# Altium PCB PCB1.PcbDoc (part 2 of 2)
Units mil, origin at the board's own origin, x right, y up, seen from the top; angles counter-clockwise.
Board outline 6000 x 4000 mil, 2 copper layers (Top Layer, Bottom Layer); 40 components, 154 nets, 422 pads, 267 vias.
Unrouted connection lines stored in the file: 27.
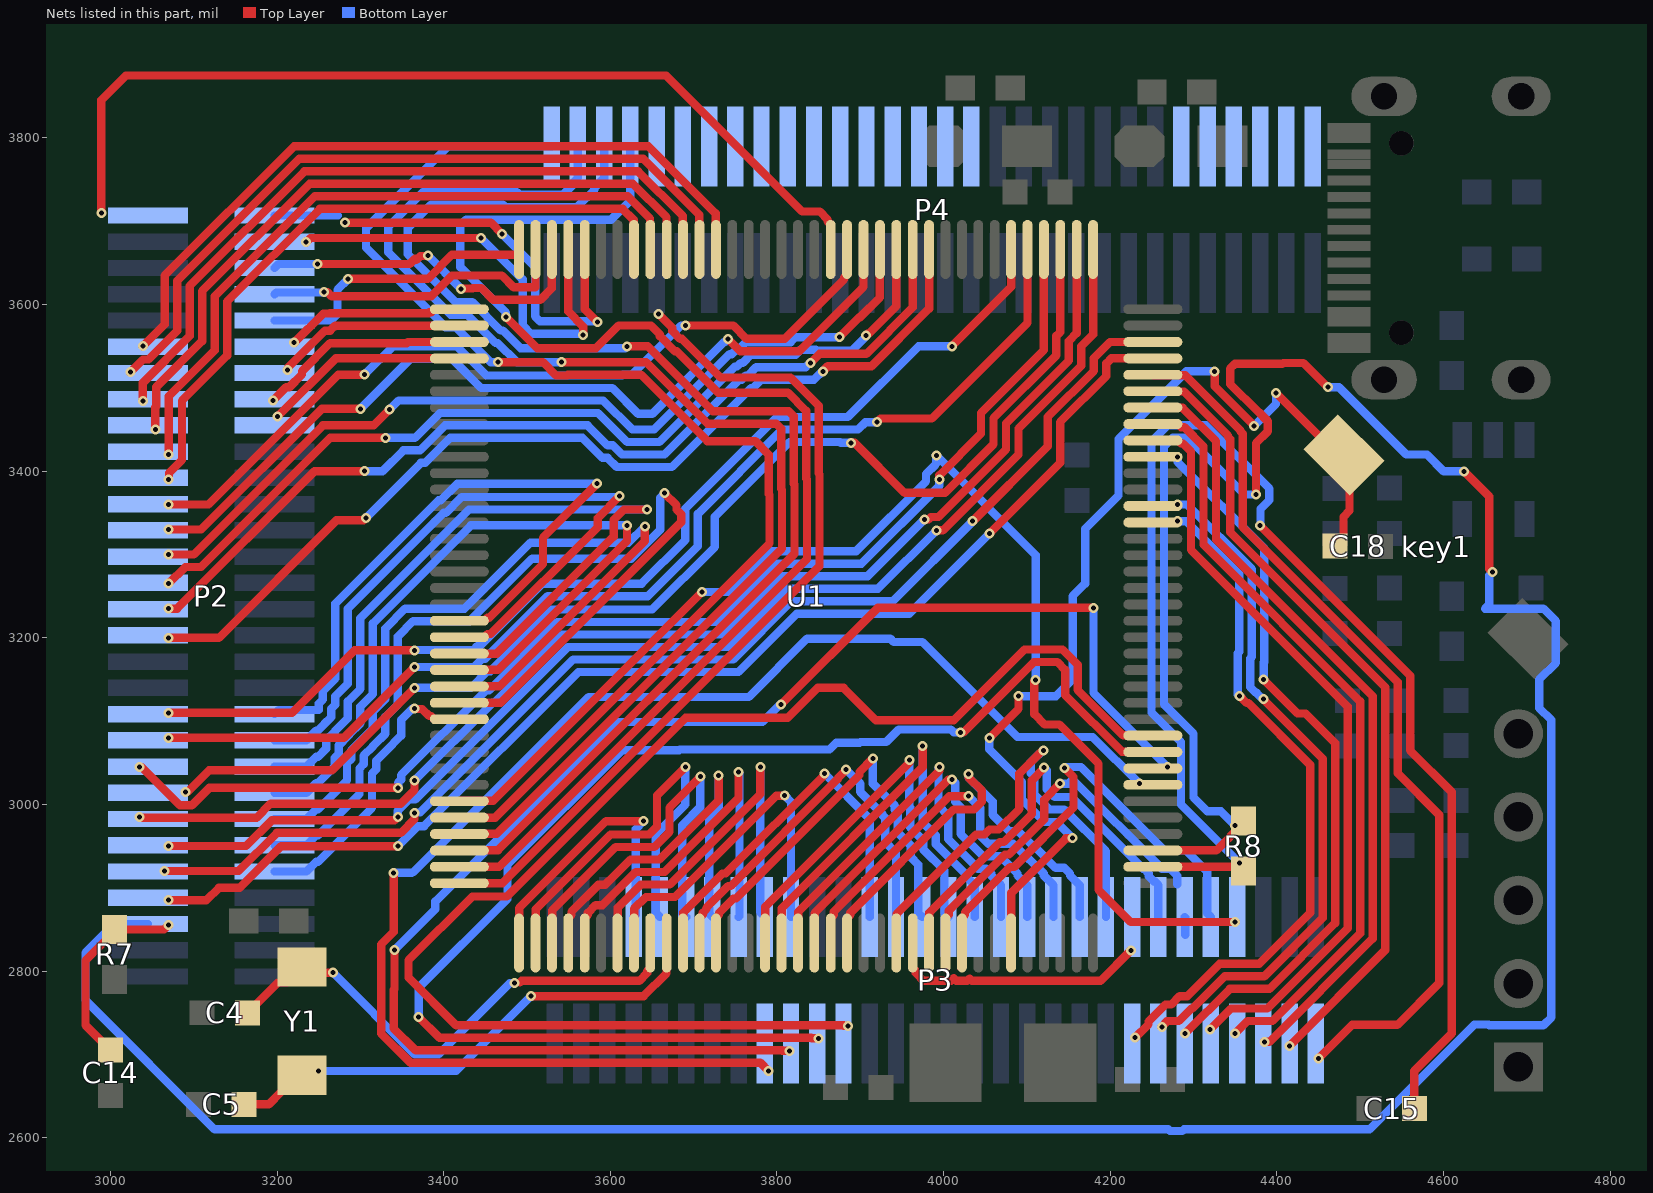
[diagram p2: the nets of this part, all layers, seen from the top]

## Via types
v1: diameter 12, hole 6, Top Layer to Bottom Layer, 267 vias

## Nets (pads, with @x,y where several pads share a name; then routed paths per layer and width w, separated by ;. In a path a pad name is that pad's centre, name@x,y a point inside that pad or via, vN(x,y) a via of type N, cw(c..) or ccw(c..) an arc to the next point about the centre after c; other vN are vias at no path point) (continued)
PC10: P3.53 U1.139 | length 1550.2
  Top Layer w10: U1.139@3418.74,3003.94 3419.09,3004.28 3459.43,3004.28 3710,3254.85 v1(3710,3255) ; v1(4110.5,3149.5) 4109,3148 4109,3108.37 4121.37,3096 4139,3096 4186,3049 4186,2897.54 4224.54,2859 v1(4350,2859)
  Bottom Layer w10: v1(3710,3255) 3743.84,3255 3792.84,3304 3895.21,3304 3979,3387.79 3979,3396.63 3990,3407.63 3990,3407.69 3990.93,3408.62 3990.93,3419.07 3990.66,3419.34 4110.5,3299.5 v1(4110.5,3149.5)
  other v1: 3991.31,3418.69
PC11: P4.60 U1.140 | length 1489.8
  Top Layer w10: U1.140@3418.74,2984.25 3461.88,2984.25 3791,3313.37 3791,3371.63 3790,3372.63 3790,3420 3773.95,3436.05 3716.52,3436.05 3636.57,3516 3549.25,3516 3548.25,3515 3535,3515 3519,3531 v1(3465.17,3531)
  Bottom Layer w10: v1(3465.17,3531) 3464.94,3530.77 3456.66,3530.77 3414.43,3573 3402,3573 3306.67,3668.33 3306.67,3691.67 3405,3790 P4.60@3529.53,3790
PC12: P4.58 U1.141 | length 1557.3
  Top Layer w10: U1.141@3418.74,2964.57 3419.09,2964.91 3463.75,2964.91 3806,3307.16 3806,3377.84 3805,3378.84 3805,3451.25 3799.14,3457.11 3716.68,3457.11 3642.79,3531 v1(3541.63,3531)
  Bottom Layer w10: v1(3541.63,3531) 3487.8,3531 3464.8,3554 3462.16,3554 3428.16,3588 3408.21,3588 3333.54,3662.67 3333.54,3693.54 3375,3735 3487.74,3735 3490.77,3731.97 3543.51,3731.97 3556.18,3744.64 3556.18,3746.97 3561.02,3751.81 P4.58@3561.02,3790
PC13: P3.19 U1.8 | length 427
  Top Layer w10: U1.8@3628.31,2833.74 3628.65,2834.09 3628.65,2874.87 3642.79,2889 3677.69,2889 3799.33,3010.63 v1(3809.37,3010.63)
  Bottom Layer w10: v1(3809.37,3010.63) 3816.93,3003.07 P3.19@3816.93,2865
PC14: C4.2 U1.9 Y1.2 | length 617.6
  Top Layer w10: C4.2@3164.5,2749.94 3200.9,2786.34 3211.38,2786.34 Y1.2@3230,2804.96 3236.82,2798.14 v1(3267,2798.14) ; 3491.38,2786.38 3493.31,2788.31 3634.9,2788.31 3644.21,2797.62 3644.21,2799.94 3647.99,2803.72 U1.9@3647.99,2833.74
  Bottom Layer w10: v1(3267,2798.14) 3365.14,2700 3393.69,2700 3479.3,2785.62 3484.62,2785.62 v1(3485,2786)
PC15: C5.2 U1.10 Y1.1 | length 587.6
  Top Layer w10: C5.2@3160,2640 3190,2640 3205.47,2655.47 3205.47,2656.42 3224.09,2675.04 Y1.1@3230,2675.04 ; v1(3505,2770) 3640,2770 3667.33,2797.33 3667.33,2833.39 U1.10@3667.68,2833.74
  Bottom Layer w10: v1(3250,2680) 3415,2680 v1(3505,2770)
PD0: P4.56 U1.142 | length 1595
  Top Layer w10: U1.142@3418.74,2944.88 3419.09,2945.23 3465.28,2945.23 3821,3300.95 3821,3384.05 3820,3385.05 3820,3466.25 3814.14,3472.11 3722.89,3472.11 3645,3550 v1(3620,3550)
  Bottom Layer w10: P4.56@3592.52,3790 3592.52,3751.81 3580.87,3740.16 3580.87,3737.83 3560.01,3716.97 3474.02,3716.97 3470.99,3720 3385,3720 3356.65,3691.65 3356.65,3660.78 3414.43,3603 3434.37,3603 3468.37,3569 3471.01,3569 3492.26,3547.75 3617.75,3547.75 v1(3620,3550)
PD1: P4.54 U1.143 | length 1593.3
  Top Layer w10: U1.143@3418.74,2925.2 3466.46,2925.2 3836,3294.73 3836,3390.27 3835,3391.27 3835,3472.47 3813.07,3494.39 3729.39,3494.39 3679.79,3544 3677.58,3544 3659.43,3562.16 3659.43,3564.36 3648.79,3575 3610,3575 3582.75,3547.75 3512.25,3547.75 v1(3475,3585)
  Bottom Layer w10: v1(3475,3585) 3474.62,3585.38 3474.62,3590.38 3420,3645 3420,3695 3426.97,3701.97 3601.11,3701.97 3624.02,3724.87 P4.54@3624.02,3790
PD2: P4.52 U1.144 | length 1022.9
  Top Layer w10: U1.144@3418.74,2905.51 3470.51,2905.51 3851,3286 3851,3396.48 3850,3397.48 3850,3478.68 3816.18,3512.5 3732.5,3512.5 3686,3559 3683.8,3559 3674.43,3568.37 3674.43,3571.99 v1(3657.77,3588.64)
PD3: P4.50
PD4: P4.48
PD5: P4.46
PD6: P4.44
PD7: P4.42
PD8: P2.49 U1.96 | length 897.9
  Top Layer w10: v1(3038.93,3550.07) 3065,3576.14 3065,3634.79 3220.21,3790 3645.88,3790 3726.39,3709.5 3726.39,3666.61 U1.96@3726.73,3666.26
PD9: P2.47 U1.97 | length 893.6
  Top Layer w10: v1(3023.93,3518.92) 3039.08,3534.07 3045.56,3534.07 3080,3568.51 3080,3628.57 3226.43,3775 3639.67,3775 3706.7,3707.97 3706.7,3666.61 U1.97@3707.05,3666.26
PD10: P2.45 U1.98 | length 872.7
  Top Layer w10: v1(3038.93,3484.46) 3038.93,3506.23 3095,3562.3 3095,3622.36 3232.64,3760 3633.45,3760 3687.02,3706.44 3687.02,3666.61 U1.98@3687.36,3666.26
PD11: P2.43 U1.99 | length 855.4
  Top Layer w10: v1(3053.93,3450.07) 3053.93,3476.84 3054.93,3477.84 3054.93,3501.02 3110,3556.08 3110,3616.15 3238.85,3745 3627.24,3745 3667.33,3704.91 3667.33,3666.61 U1.99@3667.68,3666.26
PD12: P2.41 U1.100 | length 833.3
  Top Layer w10: v1(3069.93,3420.07) 3069.93,3489.93 3125,3545 3125,3609.93 3245.07,3730 3621.03,3730 3647.65,3703.38 3647.65,3666.61 U1.100@3647.99,3666.26
PD13: P2.39 U1.101 | length 817.9
  Top Layer w10: v1(3069.93,3390.07) 3070.31,3390.45 3070.31,3397.82 3085.93,3413.44 3085.93,3484.72 3140,3538.79 3140,3603.72 3251.28,3715 3614.81,3715 3627.96,3701.85 3627.96,3666.61 U1.101@3628.31,3666.26
PD14: P2.60 U1.104 | length 557.4
  Top Layer w10: v1(3281.54,3698.46) 3456.54,3698.46 v1(3470,3685) ; U1.104@3569.25,3666.26 3569.25,3594.59 v1(3584.84,3579)
  Bottom Layer w10: P2.60@3196.97,3706.93 3273.07,3706.93 ; v1(3470,3685) 3509.68,3645.32 3509.68,3585.86 3515.54,3580 3583.84,3580 v1(3584.84,3579)
PD15: P2.58 U1.105 | length 525
  Top Layer w10: v1(3235,3675) 3240,3680 v1(3445,3680) ; U1.105@3549.57,3666.26 3549.57,3591.65 3567.46,3573.75 v1(3567.46,3563.75)
  Bottom Layer w10: v1(3445,3680) 3494.68,3630.32 3494.68,3579.64 3495,3579.33 3495,3574.64 3504.64,3565 3566.21,3565 v1(3567.46,3563.75)
PE0: P4.12
PE1: P4.10
PE2: P3.7 U1.1 | length 354.5
  Top Layer w10: U1.1@3490.53,2833.76 3490.53,2875.53 3595,2980 v1(3640,2980)
  Bottom Layer w10: P3.7@3627.95,2865 3630.62,2867.66 3630.62,2970.62 v1(3640,2980)
PE3: P3.9 U1.2 | length 510
  Top Layer w10: U1.2@3510.2,2833.74 3510.54,2834.09 3510.54,2874.33 3600.21,2964 3646.63,2964 3656,2973.37 3656,3011 3689.98,3044.98 v1(3690.3,3044.98)
  Bottom Layer w10: P3.9@3659.45,2865 3654.61,2869.84 3654.61,2964.61 3690,3000 3690,3044.68 v1(3690.3,3044.98)
PE4: P3.11 U1.3 | length 479.9
  Top Layer w10: U1.3@3529.88,2833.74 3530.23,2834.09 3530.23,2872.8 3606.43,2949 3652.84,2949 3671,2967.16 3671,2996.1 v1(3708.25,3033.35)
  Bottom Layer w10: P3.11@3690.95,2865 3686.43,2869.52 3686.43,2975.21 3707.92,2996.71 3707.92,3033.02 v1(3708.25,3033.35)
PE5: P3.13 U1.4 | length 477.4
  Top Layer w10: U1.4@3549.57,2833.74 3549.57,2863.76 3553.35,2867.54 3553.35,2871.38 3585.62,2903.66 3593.8,2903.66 3605.15,2915 3624.15,2934 3659.05,2934 3730,3004.95 v1(3730,3035)
  Bottom Layer w10: P3.13@3722.44,2865 3718.83,2868.61 3718.83,2985.87 3730,2997.03 v1(3730,3035)
PE6: P3.15 U1.5 | length 481.8
  Top Layer w10: U1.5@3569.25,2833.74 3569.25,2863.76 3573.03,2867.54 3573.03,2869.86 3582.35,2879.17 3590.53,2879.17 3630.36,2919 3665.27,2919 3753.94,3007.67 v1(3753.94,3038.94)
  Bottom Layer w10: P3.15@3753.94,2865 3755,2866.06 3755,3037.33 3753.94,3038.4 v1(3753.94,3038.94)
PE7: P3.60 U1.68 | length 1077.5
  Top Layer w10: U1.68@4251.26,3515.75 4251.61,3515.4 4290.06,3515.4 4356.43,3449.03 4356.43,3447.48 4359,3444.9 4359,3333.02 4545,3147.02 4545,3037.63 4595,2987.63 4595,2785.73 4544.75,2735.47 4490.47,2735.47 v1(4450,2695)
PE8: P2.7 U1.69 | length 1463.3
  Top Layer w10: v1(3069.93,2885.07) 3115.07,2885.07 3130,2900 3155,2900 3205,2950 v1(3345,2950) ; v1(4055,3325) 4140,3410 4140,3458.93 4195.43,3514.37 4195.43,3529.58 4201.29,3535.43 U1.69@4226.22,3535.43
  Bottom Layer w10: v1(3345,2950) 3369,2974 3376.57,2974 3561.57,3159 3753.91,3159 3823.91,3229 3959,3229 v1(4055,3325)
PE9: P2.9 U1.70 | length 1483.4
  Top Layer w10: v1(3064.93,2920.07) 3153.86,2920.07 3199.79,2966 3348.63,2966 3365,2982.37 v1(3365,2990) ; v1(4035.03,3339.97) 4125,3429.95 4125,3465.15 4180.43,3520.58 4180.43,3535.79 4199.76,3555.12 U1.70@4251.26,3555.12
  Bottom Layer w10: v1(3365,2990) 3365.38,2990.38 3371.74,2990.38 3555.36,3174 3747.69,3174 3817.69,3244 3939.05,3244 v1(4035.03,3339.97)
PE10: P2.11 U1.73 | length 1502.5
  Top Layer w10: v1(3069.93,2950.07) 3162.64,2950.07 3193.57,2981 3341,2981 v1(3345,2985) ; v1(3991.37,3329) 3999.05,3329 4090,3419.95 4090,3451.36 4165.43,3526.79 4165.43,3550.08 4179.49,3564.14 U1.73@4179.49,3666.26
  Bottom Layer w10: v1(3345,2985) 3345,2992.63 3358.37,3006 3366,3006 3549,3189 3741.48,3189 3811.48,3259 3921.37,3259 v1(3991.37,3329)
PE11: P2.13 U1.74 | length 1505.4
  Top Layer w10: v1(3035,2985) 3036,2984 3175.36,2984 3192.36,3001 3348.63,3001 3365,3017.37 v1(3365,3028.61) ; v1(3976.82,3341.77) 3977.21,3342.15 3981.9,3342.15 3984.75,3345 3993.84,3345 4075,3426.16 4075,3457.57 4150.43,3533.01 4150.43,3556.29 4159.8,3565.66 U1.74@4159.8,3666.26
  Bottom Layer w10: v1(3365,3028.61) 3458.39,3122 3460.49,3122 3542.49,3204 3735.27,3204 3805.27,3274 3909,3274 v1(3976.82,3341.77) v1(3976.82,3341.77)
PE12: P2.15 U1.75 | length 1481.7
  Top Layer w10: v1(3090,3015) 3092.37,3015 3118.33,3040.96 3265.96,3040.96 v1(3365,3140) ; v1(3888.75,3434) 3893.37,3434 3953.37,3374 4001.63,3374 4060,3432.37 4060,3463.79 4135.43,3539.22 4135.43,3562.51 4140.12,3567.19 U1.75@4140.12,3666.26
  Bottom Layer w10: v1(3365,3140) 3432.55,3140 3452.55,3160 3456.07,3160 3530.07,3234 3650.21,3234 3725.52,3309.31 3725.52,3345.52 3815,3435 3876.08,3435 3876.7,3434.38 3888.36,3434.38 v1(3888.75,3434)
PE13: P2.17 U1.76 | length 1480.2
  Top Layer w10: v1(3035,3045) 3037.37,3045 3083.37,2999 3097.59,2999 3118.59,3020 v1(3345,3020) ; v1(3995,3390) 3995,3395.14 4045,3445.14 4045,3470 4120.43,3545.43 U1.76@4120.43,3666.26
  Bottom Layer w10: v1(3345,3020) 3345.38,3020.38 3345.38,3026.13 3349,3029.74 3349,3035.24 3450.76,3137 3454.28,3137 3536.28,3219 3729.05,3219 3799.05,3289 3901.43,3289 3995,3382.57 v1(3995,3390)
PE14: P2.19 U1.77 | length 1348
  Top Layer w10: v1(3069.93,3080.07) 3280.07,3080.07 v1(3365,3165) ; v1(3920,3459) 3924.34,3463.34 3985.97,3463.34 4100.75,3578.12 U1.77@4100.75,3666.26
  Bottom Layer w10: v1(3365,3165) 3436.34,3165 3446.34,3175 3449.85,3175 3524.85,3250 3645,3250 3705,3310 3705,3348.79 3806.21,3450 3897.37,3450 3905.99,3458.62 3919.62,3458.62 v1(3920,3459)
PE15: P2.21 U1.78 | length 1290
  Top Layer w10: v1(3069.93,3110.07) 3217.91,3110.07 3292.84,3185 v1(3365,3185) ; v1(4010,3550) 4010,3550.25 4081.06,3621.31 U1.78@4081.06,3666.26
  Bottom Layer w10: v1(3365,3185) 3365.38,3185.38 3435.51,3185.38 3440.12,3190 3443.64,3190 3518.64,3265 3637.57,3265 3690,3317.43 3690,3355 3800,3465 3885,3465 3970,3550 v1(4010,3550)
PF0: P3.31 U1.16 | length 498.8
  Top Layer w10: U1.16@3785.79,2833.74 3786.13,2834.09 3786.13,2877.35 3959,3050.21 v1(3959,3053.19)
  Bottom Layer w10: v1(3959,3053.19) 3959,2997.31 3960,2996.31 3960,2972.3 3975.6,2956.7 3975.6,2946.11 4001.06,2920.65 4001.06,2869.84 P3.31@4005.91,2865
PF1: P3.33 U1.17 | length 537.3
  Top Layer w10: U1.17@3805.47,2833.74 3805.82,2834.09 3805.82,2875.56 3975,3044.75 v1(3975,3070)
  Bottom Layer w10: v1(3975,3070) 3975,2978.51 3990.6,2962.91 3990.6,2952.32 4025.75,2917.17 4025.75,2914.84 4037.4,2903.19 P3.33@4037.4,2865
PF2: P3.35 U1.18 | length 499.1
  Top Layer w10: U1.18@3825.16,2833.74 3825.5,2834.09 3825.5,2871.01 3995,3040.5 v1(3995,3045)
  Bottom Layer w10: v1(3995,3045) 3994,3044 3994,2998.57 4005.6,2986.98 4005.6,2958.54 4041.1,2923.03 4051.39,2923.03 4057.24,2917.17 4057.24,2914.84 4068.9,2903.19 P3.35@4068.9,2865
PF3: P3.37 U1.19 | length 481.7
  Top Layer w10: U1.19@3844.84,2833.74 3845.19,2834.09 3845.19,2869.48 4005.71,3030 v1(4010,3030)
  Bottom Layer w10: v1(4010,3030) 4014,3026 4014,3003.37 4020.6,2996.77 4020.6,2964.75 4047.32,2938.03 4067.88,2938.03 4088.74,2917.17 4088.74,2914.84 4100.39,2903.19 P3.37@4100.39,2865
PF4: P3.39 U1.20 | length 463.6
  Top Layer w10: U1.20@3864.53,2833.74 3864.53,2863.76 3868.31,2867.54 3868.31,2871.38 4006.92,3010 v1(4030,3010)
  Bottom Layer w10: v1(4030,3010) 4044,2996 4044,2962.56 4053.53,2953.03 4059.54,2953.03 4083.28,2953.03 4102.31,2934 4103.41,2934 4120.24,2917.17 4120.24,2914.84 4131.89,2903.19 P3.39@4131.89,2865
PF5: P3.41 U1.21 | length 530.1
  Top Layer w10: U1.21@3884.21,2833.74 3884.21,2863.76 3887.99,2867.54 3887.99,2869.86 4012.14,2994 4036.63,2994 4046,3003.37 4046,3016.63 4030,3032.63 v1(4030,3036.31)
  Bottom Layer w10: v1(4030,3036.31) 4030,3032.63 4059,3003.63 4059,2987.68 4078.64,2968.03 4089.49,2968.03 4108.52,2949 4109.62,2949 4134.62,2924 4144.91,2924 4151.73,2917.17 4151.73,2914.84 4163.39,2903.19 P3.41@4163.39,2865
PF6: P3.43 U1.24 | length 572.2
  Top Layer w10: U1.24@3943.27,2833.74 3943.61,2834.09 3943.61,2868.61 4039,2964 4049.05,2964 4055.05,2970 4066.21,2970 4091,2994.79 4091,3037.14 4118.86,3065 v1(4120,3065)
  Bottom Layer w10: v1(4120,3065) 4119.46,3065 4114.72,3060.26 4114.15,3060.26 4104.77,3050.89 4104.77,3037.65 4109,3033.43 4109,3012.16 4127.16,2994 4144.87,2994 4194.88,2943.99 P3.43@4194.88,2865
PF7: P3.45 U1.25 | length 320
  Top Layer w10: U1.25@3962.95,2833.74 3962.95,2803.72 3966.73,2799.94 3966.73,2797.62 3976.05,2788.31 4008.91,2788.31 4012.17,2791.56 4015.42,2788.31 4028.6,2788.31 4031.33,2791.04 4034.07,2788.31 4087.65,2788.31 4094.16,2788.31 4188.31,2788.31 v1(4225,2825)
PF8: P3.47 U1.26 | length 519.5
  Top Layer w10: U1.26@3982.64,2833.74 3982.98,2834.09 3982.98,2870.41 4067.57,2955 4072.43,2955 4106,2988.57 4106,3028.97 4120.77,3043.74 v1(4120.77,3044.26)
  Bottom Layer w10: v1(4120.77,3044.26) 4124,3041.03 4124,3018.37 4133.37,3009 4153.37,3009 4239.34,2923.03 4240.36,2923.03 4246.22,2917.17 4246.22,2913.89 4252.08,2908.03 4253.03,2908.03 4257.87,2903.19 P3.47@4257.87,2865
PF9: P3.49 U1.27 | length 473.4
  Top Layer w10: U1.27@4002.32,2833.74 4002.32,2863.76 4006.1,2867.54 4006.1,2872.32 4073.79,2940 4078.64,2940 4121,2982.36 4121,3006 v1(4140,3025)
  Bottom Layer w10: v1(4140,3025) 4150,3025 4155,3030 4261.97,2923.03 4271.86,2923.03 4280.66,2914.23 P3.49@4280.66,2904.34 ; P3.49@4289.37,2865 4290,2864.37 P3.49@4290,2843.61
PF10: P3.51 U1.28 | length 583.3
  Top Layer w10: U1.28@4022.01,2803.72 U1.28@4022.01,2833.74 4022.01,2863.76 4025.79,2867.54 4025.79,2870.79 4080,2925 4084.85,2925 4156,2996.15 4156,3033 v1(4145,3044)
  Bottom Layer w10: v1(4145,3044) 4146,3045 4165,3045 4265,2945 4290.86,2945 4316.32,2919.54 4316.32,2869.55 P3.51@4320.87,2865
PF11: P3.46 U1.59 | length 819.3
  Top Layer w10: v1(4230,2720) 4246.05,2736.05 4246.05,2739.58 4266.46,2760 4273.45,2760 4283.45,2770 4292.57,2770 4331.26,2808.69 4378.74,2808.69 4440,2869.95 4440,3047.68 4365.95,3121.73 4363.81,3121.73 4355.54,3130 v1(4355,3130)
  Bottom Layer w10: v1(4281,3340) 4291.27,3340 4355,3276.27 4355,3183.37 4353,3181.37 4353,3132 v1(4355,3130)
PF12: P3.48 U1.60 | length 825.3
  Top Layer w10: v1(4262.05,2732.95) 4262.05,2733.5 4267.9,2739.35 4267.9,2740 4282.37,2740 4297.37,2755 4298.79,2755 4337.47,2793.69 4384.95,2793.69 4455,2863.73 4455,3055 4385,3125 4385,3125.31 v1(4384,3126.31)
  Bottom Layer w10: v1(4281,3360) 4292.48,3360 4370,3282.48 4370,3177.16 4368,3175.16 4368,3141 4375.07,3133.93 4375.84,3133.93 4383.46,3126.31 v1(4384,3126.31)
PF13: P3.50 U1.63 | length 879.3
  Top Layer w10: v1(4290,2725) 4343.69,2778.69 4391.17,2778.69 4470,2857.52 4470,3073.79 4434.58,3109.2 4424.8,3109.2 v1(4384,3150)
  Bottom Layer w10: v1(4280.69,3416.98) 4281,3416.67 4281,3411.02 4385,3307.02 4385,3170.95 4384.38,3170.33 4384.38,3150.38 v1(4384,3150)
PF14: P3.52 U1.64 | length 916.7
  Top Layer w10: U1.64@4251.26,3437.01 4281.28,3437.01 4285.06,3433.23 4287.38,3433.23 4297,3423.6 4297,3305.57 4485,3117.57 4485,2851.31 4388.69,2755 4345,2755 v1(4320,2730)
PF15: P3.54 U1.65 | length 934.2
  Top Layer w10: U1.65@4251.26,3456.69 4281.28,3456.69 4285.06,3452.91 4288.9,3452.91 4312,3429.82 4312,3311.79 4500,3123.79 4500,2845.09 4394.91,2740 4365,2740 v1(4350,2725)
PG0: P3.56 U1.66 | length 948.8
  Top Layer w10: U1.66@4251.26,3476.38 4251.61,3476.03 4287,3476.03 4327,3436.03 4327,3318 4515,3130 4515,2838.88 4391.12,2715 v1(4385,2715)
PG1: P3.58 U1.67 | length 970.8
  Top Layer w10: U1.67@4251.26,3496.06 4251.61,3495.72 4288.53,3495.72 4341.43,3442.82 4341.43,3441.27 4344,3438.69 4344,3326.8 4530,3140.8 4530,2825 v1(4415,2710)
PG2: P2.56 U1.106 | length 415.3
  Top Layer w10: v1(3248.78,3648.78) 3359.24,3648.78 3365.59,3655.13 3367.15,3653.57 3371.91,3658.33 3380.96,3658.33 v1(3381.34,3658.71) ; v1(3421.05,3619) 3421.44,3619.38 3434.63,3619.38 3435.25,3620 3445.25,3620 3459.42,3605.83 3515.93,3605.83 3529.54,3619.44 3529.54,3665.91 U1.106@3529.88,3666.26
  Bottom Layer w10: P2.56@3196.97,3643.94 3201.81,3648.78 v1(3248.78,3648.78) ; v1(3381.34,3658.71) v1(3421.05,3619)
PG3: P2.54 U1.107 | length 377.8
  Top Layer w10: v1(3256.5,3615.02) 3260.52,3615.02 3265.54,3610 3385,3610 3410,3635 3469.75,3635 3483.92,3620.83 3509.71,3620.83 3510.2,3621.31 U1.107@3510.2,3666.26
  Bottom Layer w10: P2.54@3196.97,3612.44 3199.17,3614.64 3256.12,3614.64 v1(3256.5,3615.02)
PG4: P2.52 U1.108 | length 349.4
  Top Layer w10: v1(3285,3631) 3381,3631 3410,3660 3489.68,3660 3490.51,3660.84 U1.108@3490.51,3666.26
  Bottom Layer w10: P2.52@3196.97,3580.95 3264.47,3580.95 3272.5,3588.97 3272.5,3617.96 3285,3630.46 v1(3285,3631)
PG5: P2.50 U1.109 | length 214.8
  Top Layer w10: v1(3220.58,3554.42) 3255.43,3589.27 3263.06,3589.27 3263.59,3589.8 3381.72,3589.8 3382.62,3590.71 3384.94,3590.71 3388.72,3594.49 U1.109@3418.74,3594.49
PG6: P2.48 U1.110 | length 229.7
  Top Layer w10: v1(3212.58,3521.42) 3212.58,3523.79 3257.57,3568.79 3263.79,3568.79 3269.8,3574.8 U1.110@3418.74,3574.8
PG7: P2.46 U1.111 | length 255
  Top Layer w10: v1(3195,3485) 3210.8,3500.8 3214.58,3500.8 3230,3516.21 3230,3520 3263.79,3553.79 3355.66,3553.79 3356.99,3555.12 U1.111@3418.74,3555.12
PG8: P2.44 U1.112 | length 247.1
  Top Layer w10: v1(3200.56,3465.61) v1(3200.56,3465.61) 3270.43,3535.43 U1.112@3418.74,3535.43
PG9: P4.40
PG10: P4.38
PG11: P4.36
PG12: P4.34
PG13: P4.32
PG14: P4.30
PG15: P4.28
PH2: P3.18 U1.43 | length 1766.2
  Top Layer w10: v1(3340,2918) 3340,2846.91 3325,2831.91 3325,2725.15 3360.15,2690 3370.15,2690 3780,2690 v1(3790,2680)
  Bottom Layer w10: v1(3340,2918) 3361.79,2918 3362.79,2919 3364,2919 3574,3129 3766.33,3129 3836.33,3199 3936.05,3199 3940.11,3194.95 3974.53,3194.95 4088.47,3081 4179,3081 v1(4235,3025)
PH3: P3.20 U1.44 | length 1823.1
  Top Layer w10: v1(3341,2825.29) 3341,2778.55 3340,2777.55 3340,2731.36 3366.36,2705 3376.36,2705 3806,2705 3806.62,2704.38 3814.62,2704.38 v1(3815,2704) ; v1(3805,3120) 3921,3236 v1(4180,3236)
  Bottom Layer w10: v1(3341,2825.29) 3390,2874.29 3390,2883.64 3605.36,3099 3782.59,3099 3803.59,3120 v1(3805,3120) ; v1(4180,3236) 4180,3134 v1(4269,3045)
PH4: P3.22 U1.45 | length 1658.6
  Top Layer w10: v1(3370,2745) 3395,2720 3841,2720 3841.62,2719.38 3849.62,2719.38 v1(3850,2719) ; v1(4020.07,3086.31) 4023.68,3086.31 4108.37,3171 4136.63,3171 4146,3161.63 4146,3131.43 4214.09,3063.34 4250.91,3063.34 U1.45@4251.26,3062.99
  Bottom Layer w10: v1(3370,2745) 3370,2780 3476.61,2886.61 3476.61,2927.83 3613.79,3065 3682.37,3065 3683.37,3066 3863.16,3066 3871.16,3074 3899.05,3074 3900.05,3075 3931.21,3075 3946.21,3090 4008.79,3090 4012.4,3086.38 4019.99,3086.38 v1(4020.07,3086.31)
PH5: P3.24 U1.46 | length 1712.9
  Top Layer w10: v1(3885,2734) 3884.62,2734.38 3880.41,2734.38 3879.8,2735 3415,2735 3357.83,2792.17 3357.83,2813.08 3434.35,2889.61 3475.82,2889.61 3690.21,3104 3812.79,3104 3848.79,3140 3880,3140 3919,3101 4012.14,3101 4097.14,3186 4142.84,3186 4161,3167.84 4161,3137.64 4215.62,3083.02 4250.91,3083.02 U1.46@4251.26,3082.68
PH6: P2.27 U1.83 | length 1176.5
  Top Layer w10: v1(3069.93,3200.07) 3130.07,3200.07 3271,3341 3303.63,3341 v1(3306.58,3343.96) ; v1(3855,3520) 3861,3526 3913.57,3526 3982.64,3595.06 U1.83@3982.64,3666.26
  Bottom Layer w10: v1(3306.58,3343.96) 3372.63,3410 3377.72,3410 3407.72,3440 3566.51,3440 3590.51,3416 3596.72,3416 3607.72,3405 3673.79,3405 3768.79,3500 3771.36,3500 3781.36,3510 3844.46,3510 3854.46,3520 v1(3855,3520)
PH7: P2.29 U1.84 | length 1141.4
  Top Layer w10: v1(3069.93,3235.07) 3080.07,3235.07 3245,3400 v1(3305,3400) ; v1(3840,3530) 3851,3541 3907.36,3541 3962.95,3596.59 U1.84@3962.95,3666.26
  Bottom Layer w10: v1(3305,3400) 3326.63,3400 3351.63,3425 3371.51,3425 3401.51,3455 3572.72,3455 3596.72,3431 3602.93,3431 3613.93,3420 3665,3420 3755,3510 3757.57,3510 3762.57,3515 3765.15,3515 3775.15,3525 3834.46,3525 3839.46,3530 v1(3840,3530)
PH8: P2.31 U1.85 | length 1109.9
  Top Layer w10: v1(3069.93,3265.07) 3089.93,3285.07 3108.86,3285.07 3263.79,3440 v1(3330,3440) ; v1(3906.87,3563.13) 3908.73,3565 3910,3565 3943.27,3598.27 U1.85@3943.27,3666.26
  Bottom Layer w10: v1(3330,3440) 3365.29,3440 3395.29,3470 3585.15,3470 3620.15,3435 3658.79,3435 3749.4,3525.62 3751.98,3525.62 3756.36,3530 3758.93,3530 3768.93,3540 3822.59,3540 3828.59,3546 3846.63,3546 3847.63,3545 3890,3545 3906.87,3561.87 v1(3906.87,3563.13)
PH9: P2.33 U1.86 | length 1068.1
  Top Layer w10: v1(3069.93,3300.07) 3100.07,3300.07 3255,3455 3316,3455 v1(3335,3474) ; v1(3875,3561) 3898.98,3584.98 3899.98,3584.98 3923.58,3608.58 U1.86@3923.58,3666.26
  Bottom Layer w10: v1(3335,3474) 3346,3485 3591.36,3485 3626.36,3450 3652.57,3450 3743.19,3540.62 3745.76,3540.62 3750.15,3545 3752.72,3545 3762.72,3555 3816.37,3555 3822.37,3561 v1(3875,3561)
PH10: P2.35 U1.87 | length 1066.2
  Top Layer w10: v1(3069.93,3330.07) 3108.86,3330.07 3253.79,3475 v1(3300,3475) ; v1(3741.52,3558.48) 3756,3544 3826.59,3544 3903.9,3621.31 U1.87@3903.9,3666.26
  Bottom Layer w10: v1(3300,3475) 3360,3535 3410,3535 3445,3500 3602.37,3500 3633.37,3469 3650.36,3469 3736.98,3555.62 3738.12,3555.62 3740.98,3558.48 v1(3741.52,3558.48)
PH11: P2.37 U1.88 | length 1002.3
  Top Layer w10: v1(3069.93,3360.07) 3117.64,3360.07 3273.57,3516 v1(3305,3516) ; v1(3690.43,3575) 3747.63,3575 3763.63,3559 3809.29,3559 3880.43,3630.14 3880.43,3632.46 3884.21,3636.24 U1.88@3884.21,3666.26
  Bottom Layer w10: v1(3305,3516) 3339,3550 3416.21,3550 3451.21,3515 3614.15,3515 3615,3515.85 3625.85,3515.85 3685,3575 v1(3690.43,3575)
PH12: P2.59 U1.89 | length 1128.7
  Top Layer w10: v1(2989,3710) 2989,3845.57 3018.43,3875 3666.95,3875 3830.25,3711.69 3851.43,3711.69 3860.75,3702.38 3860.75,3700.06 3864.53,3696.28 U1.89@3864.53,3666.26
PH13: P2.22 U1.128 | length 816.6
  Top Layer w10: U1.128@3418.74,3220.47 3448.76,3220.47 3452.54,3224.25 3454.86,3224.25 3519.18,3288.57 3519.18,3320.3 v1(3583.88,3385)
  Bottom Layer w10: P2.22@3196.97,3108.5 3201.81,3113.35 3250.19,3113.35 3250.19,3121.2 3255,3126.02 3255,3136.3 3270,3151.3 3270,3241.21 3393.79,3365 3396.36,3365 3416.36,3385 v1(3583.88,3385)
PH14: P2.20 U1.129 | length 869
  Top Layer w10: U1.129@3418.74,3200.79 3448.76,3200.79 3452.54,3204.57 3456.38,3204.57 3585,3333.18 3585,3343.84 v1(3611.16,3370)
  Bottom Layer w10: P2.20@3196.97,3077.01 3235.16,3077.01 3246.81,3088.66 3249.14,3088.66 3256.55,3096.07 3256.55,3096.29 3265.19,3104.93 3265.19,3114.99 3270,3119.8 3270,3130.09 3285,3145.09 3285,3235 3400,3350 3402.57,3350 3421.57,3369 3610.16,3369 v1(3611.16,3370)
PH15: P2.18 U1.130 | length 951.3
  Top Layer w10: U1.130@3418.74,3181.1 3463.69,3181.1 3604,3321.41 3604,3341.63 3616.37,3354 v1(3644,3354)
  Bottom Layer w10: P2.18@3196.97,3045.51 3235.16,3045.51 3246.81,3057.17 3249.14,3057.17 3259,3067.02 3259,3077.31 3270,3088.31 3270,3088.49 3271.55,3090.04 ; 3271.55,3090.08 3285,3103.53 3285,3123.87 3300,3138.87 3300,3223.64 3430.36,3354 v1(3644,3354)
PI0: P2.16 U1.131 | length 913.9
  Top Layer w10: U1.131@3418.74,3161.42 3419.09,3161.76 3465.56,3161.76 3620,3316.2 v1(3620,3335)
  Bottom Layer w10: P2.16@3196.97,3014.02 3235.16,3014.02 3246.81,3025.67 3249.14,3025.67 3269,3045.53 3269,3055.81 3274,3060.81 3274,3071.09 3285,3082.09 3285,3082.28 3286.55,3083.83 3300,3097.32 3300,3117.66 3315,3132.66 3315,3217.43 3432.57,3335 v1(3620,3335)
PI1: P2.14 U1.132 | length 982.2
  Top Layer w10: U1.132@3418.75,3141.75 3466.76,3141.75 3641.37,3316.36 v1(3641.37,3333.85)
  Bottom Layer w10: P2.14@3196.97,2982.52 3235.16,2982.52 3246.81,2994.17 3249.14,2994.17 3284,3029.03 3284,3049.6 3289,3054.6 3289,3064.88 3300,3075.88 3300,3076.07 3301.55,3077.61 ; 3301.55,3077.65 3315,3091.11 3315,3111.45 3330,3126.45 3330,3211.21 3353.79,3235 3425,3235 3504.25,3314.25 3621.88,3314.25 3641.37,3333.75 v1(3641.37,3333.85)
PI2: P2.12 U1.133 | length 1149.5
  Top Layer w10: U1.133@3418.74,3122.05 3468.27,3122.05 3685,3338.77 3685,3348.46 3679.38,3354.08 3679.38,3359.24 3665.16,3373.46 v1(3665.16,3374)
  Bottom Layer w10: P2.12@3196.97,2951.02 3235.16,2951.02 3246.81,2962.68 3249.14,2962.68 3299,3012.54 3299,3043.38 3304,3048.38 3304,3058.67 3315,3069.67 3315,3069.85 3316.55,3071.4 ; 3316.55,3071.44 3330,3084.89 3330,3105.23 3345,3120.23 3345,3201.63 3363.37,3220 3431.21,3220 3506.21,3295 3625.15,3295 3660,3329.85 3660,3368.3 3665.16,3373.46 v1(3665.16,3374)
PI3: P2.10 U1.134 | length 349.3
  Top Layer w10: v1(3365,3115) 3365.38,3114.62 3374.15,3114.62 3382.62,3106.14 3384.94,3106.14 3388.72,3102.36 U1.134@3418.74,3102.36
  Bottom Layer w10: P2.10@3196.97,2919.53 3235.16,2919.53 3246.81,2931.18 3249.14,2931.18 3314,2996.04 3314,3037.17 3319,3042.17 3319,3052.45 3330,3063.45 3330,3063.64 3349,3082.64 3349,3101.63 3362.37,3115 v1(3365,3115)
PI4: P4.8
PI5: P4.6
PI6: P4.4
PI7: P4.2
PI8: P3.17 U1.7 | length 484.9
  Top Layer w10: U1.7@3608.62,2833.74 3608.97,2834.09 3608.97,2876.39 3636.57,2904 3671.48,2904 3780,3012.52 v1(3780,3045)
  Bottom Layer w10: v1(3780,3045) 3780,2870.43 P3.17@3785.43,2865
PI9: P3.25 U1.11 | length 470.3
  Top Layer w10: U1.11@3687.36,2833.74 3687.71,2834.09 3687.71,2870.28 3734.51,2917.08 3738.44,2917.08 3856.91,3035.55 v1(3856.91,3036.96)
  Bottom Layer w10: v1(3856.91,3036.96) 3911.42,2982.46 P3.25@3911.42,2865
PI10: P3.27 U1.12 | length 484.7
  Top Layer w10: U1.12@3707.05,2833.74 3707.05,2863.76 3710.83,2867.54 3710.83,2870 3710.97,2870 3715.51,2874.54 3715.51,2876.07 3741.52,2902.08 3744.65,2902.08 3872.91,3030.34 3872.91,3031.21 3883.08,3041.38 v1(3883.08,3041.92)
  Bottom Layer w10: v1(3883.08,3041.92) 3900,3025 3900,3015.09 3926.42,2988.67 3926.42,2987.46 3930,2983.88 3930,2954.87 3942.91,2941.95 P3.27@3942.91,2865
PI11: P3.29 U1.13 | length 515.7
  Top Layer w10: U1.13@3726.73,2833.74 3726.73,2863.76 3730.51,2867.54 3730.51,2869.86 3747.74,2887.08 3750.87,2887.08 3899.08,3035.29 3899.08,3039.08 v1(3915,3055)
  Bottom Layer w10: v1(3915,3055) 3915,3025 3941.42,2998.58 3941.42,2993.68 3945,2990.09 3945,2966.08 3960.6,2950.49 3960.6,2937 3969.57,2928.03 3969.57,2869.84 P3.29@3974.41,2865
RST: C18.2 key1.2 U1.31 | length 1297.9
  Top Layer w10: v1(4055,3079.75) 4090,3114.75 v1(4090,3130) ; U1.31@4081.06,2833.74 4081.41,2834.09 4081.41,2894.04 4146.77,2959.4 v1@4155,2959.4 ; v1(4325,3520) 4325.38,3519.62 4325.38,3502.19 4372.43,3455.15 v1(4372.43,3454.11) ; v1(4399,3494) 4473.4,3419.6 key1.2@4480.4,3419.6 4487.36,3412.64 4487.36,3352.66 4480,3345.3 4480,3320 C18.2@4470,3310
  Bottom Layer w10: v1@4055,3080 v1(4055,3079.75) 4055,3066.21 4094,3027.21 4094,3005.95 4120.95,2979 4135.75,2979 v1(4155,2959.75) ; v1(4090,3130) 4135,3130 4155,3150 4155,3250 4170,3265 4170,3330.86 4210,3370.86 4210,3438.64 4291.36,3520 v1(4325,3520) ; v1(4372.43,3454.11) 4399,3480.68 v1(4399,3494)
VDDA: C14.2 P2.5 R7.2 R8.1 U1.39 | length 4311.5
  Top Layer w10: C14.2@3000,2705 2970,2735 2970,2812.5 3005,2847.5 R7.2@3005,2850 3064.32,2850 3069.39,2855.07 v1(3069.93,2855.07) v1@3070,2855 ; U1.39@4251.26,2944.88 4327.38,2944.88 4360,2977.5 R8.1@4360,2980 ; v1(4375,3372.06) 4375,3433.65 4389.15,3447.8 4389.15,3460.01 4378.33,3470.83 4377.96,3470.83 4344,3504.79 4344,3523.14 4349.86,3529 4406.63,3529 4407.63,3530 4431.84,3530 4460.65,3501.19 v1(4461.19,3501.19) ; v1(4625,3399.75) 4655,3369.75 4655,3282.63 v1(4658.81,3278.81)
  Bottom Layer w10: P2.5@3045,2856.54 3006.81,2856.54 2995.16,2844.88 2992.83,2844.88 2970,2822.06 2970,2765 3125,2610 4269.79,2610 4271.79,2608 4286.63,2608 4288.63,2610 4511.21,2610 4637.07,2735.86 4654.14,2735.86 4655,2735 4720,2735 4729.53,2744.53 4729.53,3101.37 4715,3115.9 4715,3150 4735,3170 4735,3220 4720,3235 4650,3235 4655,3240 4655,3275 v1(4658.81,3278.81) ; v1(4350,2974.75) 4333,2991.75 4316.62,2991.75 4300,3008.37 4300,3085 4264.69,3120.31 4264.69,3429.69 4275,3440 4293.41,3440 4361.35,3372.06 v1(4375,3372.06) ; v1(4461.19,3501.19) 4461.57,3500.81 4474.56,3500.81 4555.37,3420 4580.25,3420 4600.25,3400 v1@4625,3400
VREF+: C15.1 R8.2 U1.38 | length 1703.8
  Top Layer w10: U1.38@4251.26,2925.2 4354.8,2925.2 R8.2@4360,2920 ; v1(4380,3334.64) 4444.64,3270 4560,3154.64 4560,3065 4610,3015 4610,2725 4565,2680 C15.1@4565,2635
  Bottom Layer w10: v1(4355,2929.75) 4285,2999.75 4285,3075 4249.69,3110.31 4249.69,3435.91 4268.79,3455 4315,3455 4391,3379 4391,3365.44 4380.38,3354.82 4380.38,3335.03 v1(4380,3334.64)
pads on no net: P3.10 P3.21 P3.23 P4.39 P4.41 P4.43 P4.49 P4.51 P4.53 P4.55 P4.57 P4.59 U1.6 U2.4 USBC1. USBC1.0 USBC1.A5 USBC1.A8 USBC1.B5 USBC1.B8
copper on no net:
  other v1: 4630,3010